# Allegro board SCH_TRANSFER.brd
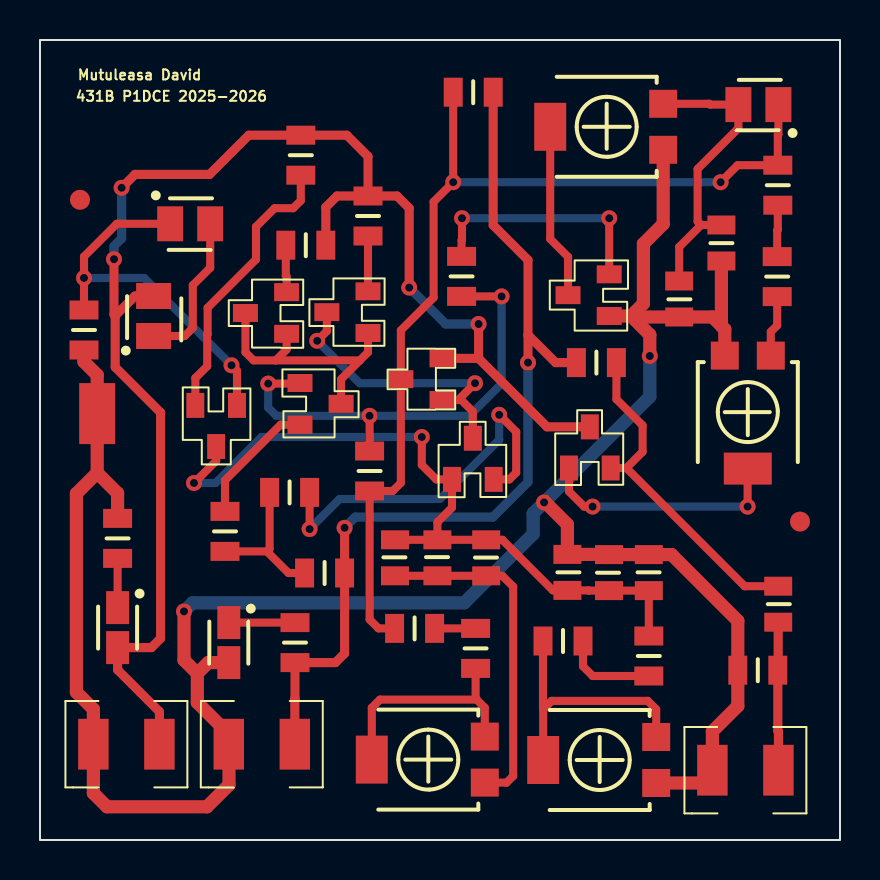
[diagram p0: board, top side]
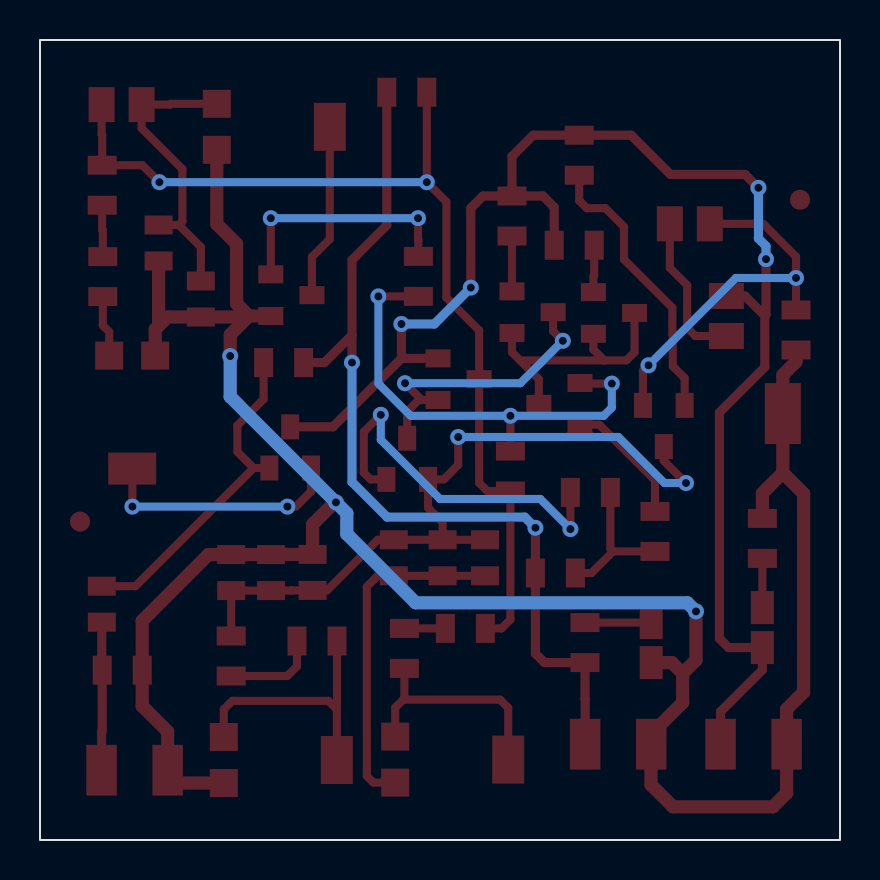
[diagram p1: board, bottom side, seen from below]

Outline 40 x 40 mm; copper layers: TOP, BOTTOM. Coordinates in mm from the lower left corner of the outline.
Outline path: rectangle 0,0 40,40

## Design rules (mm)
nets with their own width: min track width 0.406; nets N09154 N09176 N09180 N09186 N09196 N09202 N09206 N09214 N09358 N09420 N09540 N09598 N09602 N09676 N09954 N09966 N09996 N10264 N10346 N10358 N10518 N20985 N20997 N097381 N097601 N100900 N101100
nets with their own width: min track width 0.457; nets V+ V- VOUT
nets with their own width: min track width 0.66; nets GND

## Placement (name value [footprint] x y rotation side)
C1  4.7n  [CAPC2008X126N_0805]  17.75 14.11 270 top
C2  10n  [CAPC2008X126N_0805]  22.31 14.11 270 top
C3  33n  [CAPC2008X126N_0805]  19.87 14.11 270 top
C4  4.7u  [CAPC2008X126N_0805]  36.91 11.79 270 top
C5  4.7n  [CAPC2008X126N_0805]  26.37 13.38 270 top
C6  10n  [CAPC2008X126N_0805]  30.44 13.37 270 top
C7  33n  [CAPC2008X126N_0805]  28.45 13.37 270 top
C8  4.7u  [CAPC2008X126N_0805]  34.07 29.85 90 top
C9  4.7u  [CAPC2008X126N_0805]  31.96 27.05 90 top
D1  SMLS14BET  [DIOM2012X160M#2]  3.88 10.62 270 top
D2  SMLS14BET  [DIOM2012X160M#2]  9.44 9.87 270 top
J3  GND  [SMD_PAD_3-05_1-80]  2.86 21.32 90 top
NOREF  -  [unnamed]  2 32.01 0 top
NOREF#2  -  [#2]  0 40 0 top
NOREF#3  -  [#2]  40 0 90 top
NOREF#4  -  [unnamed]  38 15.92 0 top
P1  10k  [TS53YL]  22.24 5.17 0 top
P2  100k  [TS53YL]  31.16 36.81 0 top
P3  10k  [TS53YL]  34.24 24.22 90 top
P4  10k  [TS53YL]  30.81 5.15 0 top
Q1  QBC856B  [TO236AA]  9.85 21.73 90 top
Q2  QBC856B  [TO236AA]  16.4 25.35 0 top
Q3  QBC856B  [TO236AA]  12.33 25.31 0 top
Q4  QBC856B  [TO236AA]  20.1 22 0 top
Q5  QBC846B  [TO236AA]  20.6 18.03 270 top
Q6  QBC846B  [TO236AA]  13 22.85 180 top
Q7  QBC846B  [TO236AA]  26.45 18.6 270 top
Q8  JMMBFJ309LT1  [TO236AA]  28.46 26.2 0 top
R1  100  [RES2012X50N_0805]  18.73 10.58 180 top
R2  100k  [RES2012X50N_0805]  13.04 34.24 90 top
R3  100  [RES2012X50N_0805]  16.4 31.2 90 top
R4  100  [RES2012X50N_0805]  13.29 29.74 0 top
R5  1k  [RES2012X50N_0805]  21.78 9.58 90 top
R6  1k  [RES2012X50N_0805]  3.88 15.08 270 top
R7  22k  [RES2012X50N_0805]  2.2 25.5 90 top
R8  2.7k  [RES2012X50N_0805]  16.48 18.45 270 top
R9  1k  [RES2012X50N_0805]  21.08 28.18 270 top
R10  47k  [RES2012X50N_0805]  36.89 32.74 90 top
R11  100  [RES2012X50N_0805]  30.44 9.2 90 top
R12  100  [RES2012X50N_0805]  12.48 17.38 0 top
R13  100  [RES2012X50N_0805]  9.25 15.43 90 top
R14  15k  [RES2012X50N_0805]  36.86 28.17 270 top
R15  1k  [RES2012X50N_0805]  26.15 9.95 0 top
R16  2k  [RES2012X50N_0805]  27.82 23.87 0 top
R17  15k  [RES2012X50N_0805]  14.23 13.35 180 top
R18  2k  [RES2012X50N_0805]  21.66 37.39 180 top
R19  1k  [RES2012X50N_0805]  12.75 9.87 90 top
R20  820  [RES2012X50N_0805]  35.89 8.49 0 top
U1  1N4148  [DIOM2012X160M]  5.68 26.2 90 top
U2  1N4148  [DIOM2012X160M]  7.51 30.81 0 top
U3  1N4148  [DIOM2012X160M]  35.92 36.77 180 top
VCC+  J5  [1210RF_WV_12D]  4.32 4.79 180 top
VCC-  J4  [1210RF_WV_12D]  11.09 4.79 180 top
VOUT  CON2  [1210RF_WV_12D]  35.27 3.49 180 top

## Library data of the parts
C1-C9 = C
D1 D2 = SMLS14BET_0
J3 = CON1
P1-P4 = POT
Q1-Q4 = QBC856B_0
Q5 = QBC846B_2
Q6 = QBC846B_1
Q7 = QBC846B_4
Q8 = JMMBFJ309LT1_0
R1-R20 = R
U1-U3 = 1N4148_2
VCC+ VCC- VOUT = CON2

## Footprints (pads in the part's own frame, mm; a bottom-side part is the same pattern mirrored in y, then rotated)
1210RF_WV_12D
  rect 1.524x2.54 smd: 1(-1.651,0) 2(1.651,0)
CAPC2008X126N_0805
  rect 0.95x1.4 smd: 1(-0.9,0) 2(0.9,0)
DIOM2012X160M
  rect 1.3x1.75 smd: A(1,0) C(-1,0)
DIOM2012X160M#2
  rect 1.65x1.15 smd: A(1,0) C(-1,0)
RES2012X50N_0805
  rect 0.95x1.45 smd: 1(-1,0) 2(1,0)
SMD_PAD_3-05_1-80
  rect 3.05x1.8 smd: 1(0,0)
TO236AA
  rect 1.25x0.9 smd: 1(0,0) 2(0,2.083) 3(-2.057,1.041)
TS53YL
  rect 1.4x1.4 smd: 1(0,0) 3(0,-2.3)
  rect 1.6x2.4 smd: 2(-5.65,-1.15)
unnamed
  round 1 smd: (0,0)

## Nets
GND: C5.1 C6.1 C7.1 C8.1 C9.1 D2.A J3.1 P2.3(2) P3.1 P4.3(2) Q8.1(D) R6.1 R7.1 R20.1 VCC+.2 VCC-.2 VOUT.2
V+: D1.A Q4.2(E) Q7.3(C) R2.2 R3.2 R4.2 U1.A VCC+.1
V-: R16.1 R17.1 R18.1 R19.1 VCC-.1
VOUT: C4.2 R20.2 VOUT.1
N09154: Q2.1(B) Q3.1(B) Q3.3(C) Q6.3(C)
N09176: Q2.3(C) Q4.1(B) Q5.3(C)
N09180: Q3.2(E) R4.1
N09186: Q2.2(E) R3.1
N09196: Q6.2(E) R13.2
N09202: C1.1 C2.1 C3.1 C5.2 C6.2 C7.2 Q1.3(C) Q5.1(B) R11.2
N09206: R12.1 R13.1 R17.2
N09214: Q5.2(E) R12.2
N09358: Q1.1(B) R7.2 U2.C
N09420: Q1.2(E) R2.1
N09540: Q6.1(B) R8.1 R9.2
N09598: C8.2 C9.2 P2.1 U3.A
N09602: P2.2(T) Q8.3(G)
N09676: Q4.3(C) R1.2 R8.2 R10.2 R18.2 U3.C
N09954: Q8.2(S) R9.1
N09966: P3.2(T) Q7.1(B)
N09996: C4.1 Q7.2(E) R16.2
N10264: U1.C U2.A
N10346: P1.1 P1.2(T) R5.1
N10358: P4.1 P4.2(T) R15.1
N10518: C1.2 C2.2 C3.2 P1.3(2)
N20985: R10.1 R14.1
N20997: P3.3(2) R14.2
N097381: R1.1 R5.2
N097601: R11.1 R15.2
N100900: D1.C R6.2
N101100: D2.C R19.2

## Via types
v1: diameter 0.8, hole 0.4, TOP to BOTTOM, 26 vias

## Routing (per net, layer and track width the routed paths; a pad name or vN(x,y) marks a point on that pad's centre or on a via; arc(x,y) is an arc through that point)
GND: length 121.3
  TOP w0.66: R7.1 2.2,23.91 2.86,23.25 J3.1 2.86,18.36 ; P3.1 34.24,25.54 34.07,25.71 ; 29.55,26.2 Q8.1 ; 29.55,26.2 30.49,25.26 v1(30.49,24.2) ; 29.55,26.2 30.17,26.82 30.17,29.81 31.16,30.8 P2.3 ; 29.55,26.2 29.76,26.2 29.81,26.15 C9.1 33.63,26.15 34.07,25.71 ; D2.A 8.41,8.87 7.87,8.33 ; 7.87,8.33 7.2,9 v1(7.2,11.43) ; 7.87,8.33 7.87,6.87 9.44,5.3 VCC-.2 9.45,4.78 9.45,2.76 8.35,1.66 3.35,1.66 2.67,2.34 2.67,6.54 1.82,7.39 1.82,17.32 2.86,18.36 ; 2.86,18.36 3.88,17.34 R6.1 ; P4.3 32.98,2.85 VOUT.2 33.62,5.43 34.89,6.7 R20.1 34.89,10.96 31.58,14.27 C6.1 C7.1 28.44,14.28 C5.1 26.37,15.78 25.27,16.88 v1(25.2,16.88) ; C8.1 34.07,25.71
  BOTTOM w0.66: v1(7.2,11.43) 7.63,11.86 21.22,11.86 24.66,15.3 24.66,16.34 v1(25.2,16.88) 30.49,22.17 v1(30.49,24.2)
V+: length 75.1
  TOP w0.457: 21.93,24.08 21.93,24.09 v1(21.93,25.8) ; 21.93,24.08 Q4.2 ; 21.93,24.08 25.35,20.66 Q7.3 ; R4.2 14.29,31.64 14.85,32.2 R3.2 ; v1(18.46,27.62) 18.46,31.59 17.85,32.2 R3.2 ; R3.2 16.4,34.18 15.34,35.24 R2.2 10.44,35.24 8.48,33.28 4.75,33.28 v1(4.08,32.61) ; VCC+.1 5.97,6.42 3.88,8.51 D1.A 5.57,9.62 6.03,10.08 6.03,21.37 3.76,23.64 3.76,26.21 ; U1.A 4.75,27.2 3.76,26.21 ; 3.76,26.21 3.7,26.27 v1(3.7,29.04)
  BOTTOM w0.457: v1(4.08,32.61) 4.08,30.08 3.7,29.7 v1(3.7,29.04) ; v1(21.93,25.8) 20.28,25.8 v1(18.46,27.62)
V-: length 46.4
  TOP w0.457: 24.4,25.25 24.4,29 22.66,30.74 R18.1 ; 24.4,25.25 v1(24.4,23.87) ; 24.4,25.25 25.78,23.87 R16.1 ; VCC-.1 12.74,7.05 12.75,7.06 R19.1 14.77,8.87 15.23,9.33 R17.1 v1(15.23,15.61)
  BOTTOM w0.457: v1(24.4,23.87) 24.4,17.9 22.64,16.14 15.76,16.14 v1(15.23,15.61)
VOUT: length 7.4
  TOP w0.457: C4.2 36.91,8.51 R20.2 36.89,5.46 36.92,5.43 36.92,3.49
N09154: length 13.5
  TOP w0.406: Q2.1 16.4,24.39 15.99,23.98 ; 15.99,23.98 15.06,23.04 Q6.3 ; 15.99,23.98 11.79,23.98 ; Q3.3 10.27,24.39 10.68,23.98 11.79,23.98 ; 11.79,23.98 12.33,24.52 Q3.1
N09176: length 14.7
  TOP w0.406: v1(13.86,24.96) 14.34,25.44 Q2.3 ; v1(21.75,22.84) 20.91,22 ; 20.91,22 Q4.1 ; 20.91,22 21.07,22 21.64,21.42 Q5.3
  BOTTOM w0.406: v1(13.86,24.96) 15.98,22.84 v1(21.75,22.84)
N09180: length 2.4
  TOP w0.406: Q3.2 12.33,28.18 12.29,28.22 R4.1
N09186: length 2.8
  TOP w0.406: Q2.2 R3.1
N09196: length 6.5
  TOP w0.406: R13.2 9.25,17.98 12.03,20.77 Q6.2
N09202: length 37.2
  TOP w0.406: v1(19.09,20.15) 19.09,18.75 19.81,18.03 Q5.1 20.6,16.62 19.87,15.89 C3.1 ; Q1.3 8.81,18.96 v1(7.7,17.85) ; C1.1 C3.1 ; C3.1 C2.1 23.12,15.01 25.65,12.48 C5.2 27.43,12.48 27.44,12.47 C7.2 C6.2 R11.2
  BOTTOM w0.406: v1(7.7,17.85) 8.78,17.85 11.08,20.15 v1(19.09,20.15)
N09206: length 7.4
  TOP w0.406: R12.1 11.48,14.57 11.34,14.43 ; 11.34,14.43 R13.1 ; 11.34,14.43 12.42,13.35 R17.2
N09214: length 18.9
  TOP w0.406: Q5.2 23.47,18.03 23.81,18.37 23.81,20.41 v1(22.96,21.26) ; v1(13.48,15.55) R12.2
  BOTTOM w0.406: v1(22.96,21.26) 22.96,20.01 20,17.05 14.98,17.05 v1(13.48,15.55)
N09358: length 19
  TOP w0.406: v1(9.57,23.73) 9.85,23.46 Q1.1 ; U2.C 3.84,30.81 2.2,29.17 v1(2.2,28.1) R7.2
  BOTTOM w0.406: v1(9.57,23.73) 5.21,28.1 v1(2.2,28.1)
N09420: length 14.2
  TOP w0.406: R2.1 13.04,31.97 12.66,31.59 11.73,31.59 10.8,30.66 10.8,29.03 8.38,26.61 8.38,25.3 8.36,25.28 8.36,23.69 7.77,23.1 Q1.2
N09540: length 23.4
  TOP w0.406: R8.1 v1(16.48,21.21) ; v1(23.08,27.18) R9.2 ; Q6.1 12.97,22.82 v1(11.41,22.82)
  BOTTOM w0.406: v1(11.41,22.82) 11.41,21.62 11.82,21.21 v1(16.48,21.21) 21.47,21.21 23.08,22.82 v1(23.08,27.18)
N09598: length 15
  TOP w0.406: P2.1 33.47,36.81 33.51,36.77 U3.A 34.92,35.59 32.88,33.55 32.88,30.93 33.06,30.75 ; 33.06,30.75 C8.2 ; 33.06,30.75 31.96,29.65 C9.2
N09602: length 8.8
  TOP w0.406: P2.2 25.51,30.05 26.4,29.16 Q8.3
N09676: length 49.8
  TOP w0.406: R18.2 v1(20.66,32.89) 19.68,31.91 19.68,27.12 18.04,25.48 Q4.3 18.04,17.86 17.64,17.45 R8.2 16.48,11.02 16.92,10.58 R1.2 ; U3.C 36.92,35.28 36.89,35.25 R10.2 34.88,33.74 v1(34.03,32.89)
  BOTTOM w0.406: v1(20.66,32.89) v1(34.03,32.89)
N09954: length 12.1
  TOP w0.406: Q8.2 v1(28.46,31.09) ; R9.1 21.08,29.99 21.1,30.01 v1(21.1,31.09)
  BOTTOM w0.406: v1(28.46,31.09) v1(21.1,31.09)
N09966: length 12.3
  TOP w0.406: P3.2 35.38,18.56 v1(35.38,16.67) ; Q7.1 26.45,17.43 27.21,16.67 v1(27.63,16.67)
  BOTTOM w0.406: v1(27.63,16.67) v1(35.38,16.67)
N09996: length 17
  TOP w0.406: R16.2 28.82,22.04 30.13,20.73 30.13,19.41 29.32,18.6 ; C4.1 35.23,12.69 29.32,18.6 ; 28.55,18.58 Q7.2 29.32,18.6
N10264: length 7.7
  TOP w0.406: U1.C 7.23,25.2 7.64,25.61 7.64,27.74 8.51,28.61 U2.A
N10346: length 11.6
  TOP w0.406: 21.83,7.02 21.78,7.07 R5.1 ; 21.83,7.02 22.24,6.61 P1.1 ; 21.83,7.02 17,7.02 16.59,6.61 P1.2
N10358: length 13.3
  TOP w0.406: R15.1 25.15,6.54 25.16,6.53 ; 25.16,6.53 25.58,6.96 30.39,6.96 30.81,6.53 P4.1 ; 25.16,6.53 P4.2
N10518: length 17.2
  TOP w0.406: P1.3 23.33,2.87 23.66,3.2 23.66,12.67 23.12,13.21 C2.2 C3.2 C1.2
N20985: length 2.6
  TOP w0.406: R14.1 36.86,30.48 36.89,30.51 R10.1
N20997: length 3.1
  TOP w0.406: P3.3 36.54,25.41 36.86,25.73 R14.2
N097381: length 2.1
  TOP w0.406: R5.2 R1.1
N097601: length 4.8
  TOP w0.406: R11.1 27.64,8.2 27.15,8.69 R15.2
N100900: length 2.5
  TOP w0.406: D1.C R6.2
N101100: length 3.3
  TOP w0.406: D2.C R19.2

## Text on the board
Ref Des/Silkscreen Top: 431B P1DCE 2025-2026 | Mutuleasa David
XSECTION_CHART: *  SURFACE - AIR 0 MM | L1: TOP CONDUCTOR - COPPER 0.018 MM | *  DIELECTRIC - FR-4 1.564 MM | L2: BOTTOM CONDUCTOR - COPPER 0.018 MM | DESIGN CROSS SECTION CHART | ___________________________ | TOTAL THICKNESS 1.6 MM | 1-2
DISPLAY_TOP: FIGURE | SIZE | 0.4 | DRILL CHART: TOP to BOTTOM | ALL UNITS ARE IN MILLIMETERS | PLATED | QTY | 26
